# Altium PCB Var_7_PCB.PcbDoc
Units mm, origin at the board's own origin, x right, y up, seen from the top; angles counter-clockwise.
Board outline 70 x 20 mm, 3 copper layers (Top Layer, GND, Bottom Layer), stack 0.488 mm thick; 19 components, 28 nets, 100 pads, 73 vias.
Unrouted connection lines stored in the file: 40.
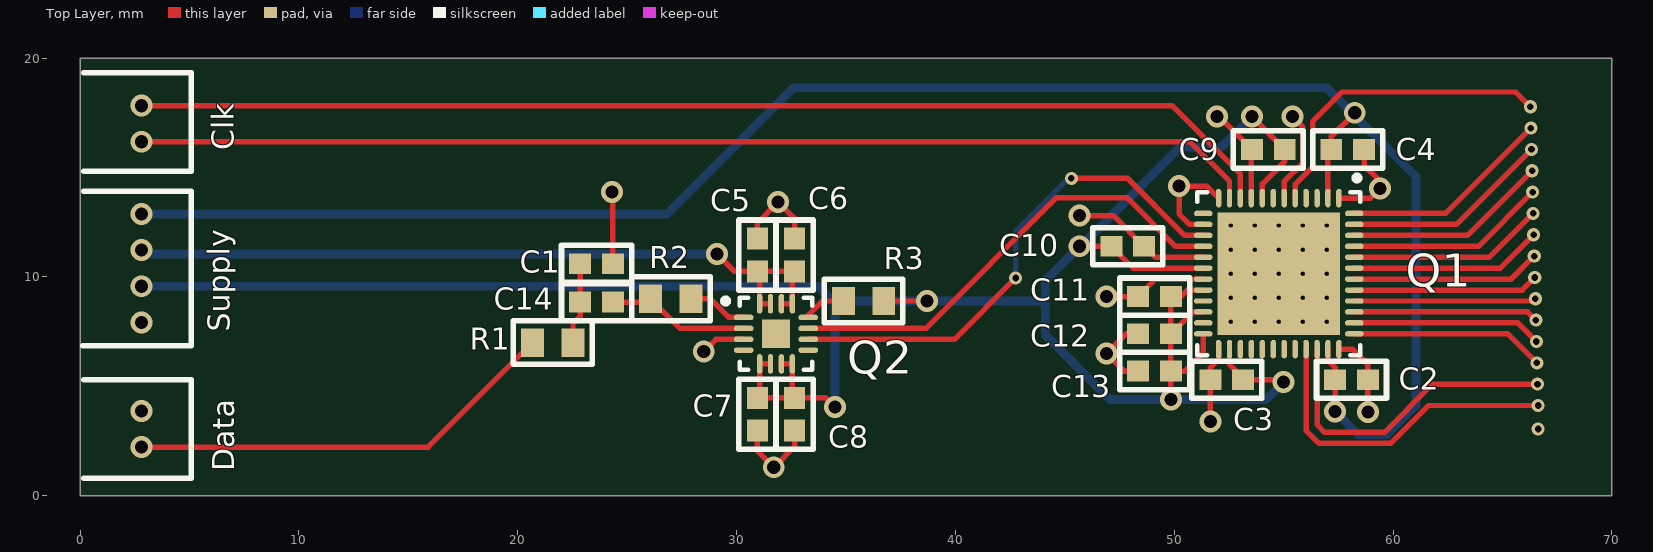
[diagram p0: Top Layer view]
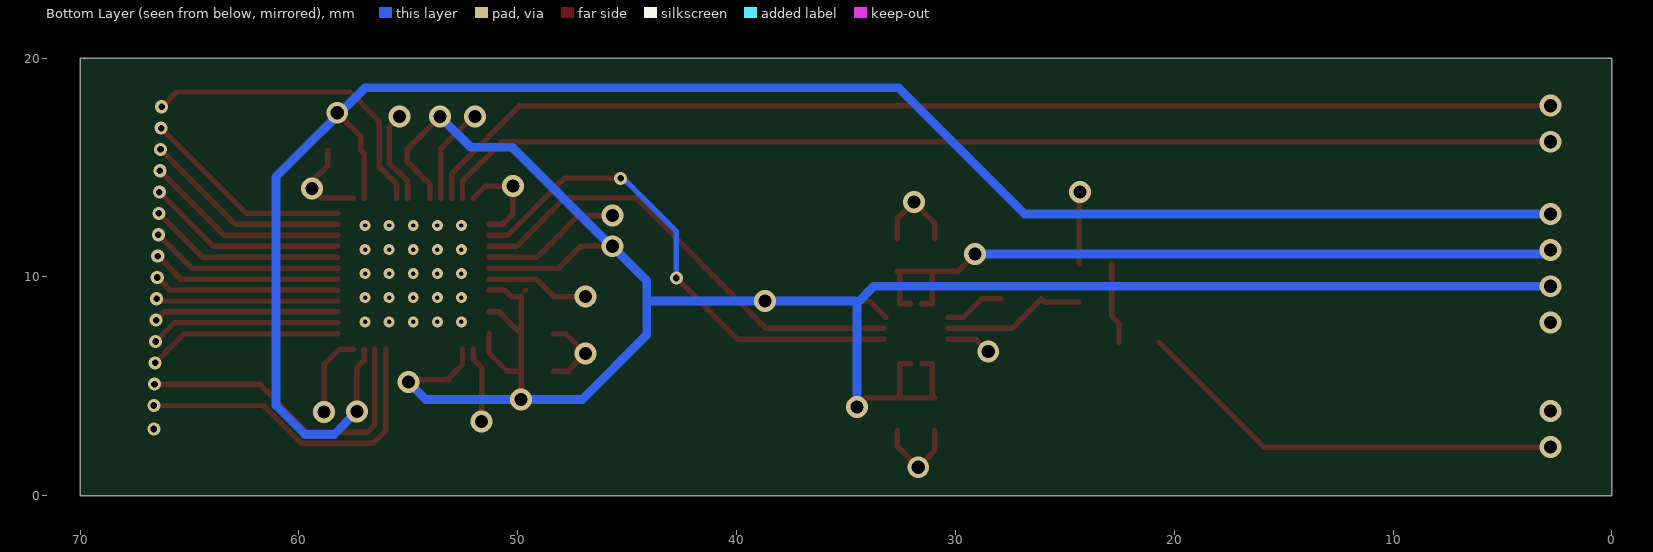
[diagram p1: Bottom Layer view, seen from below]
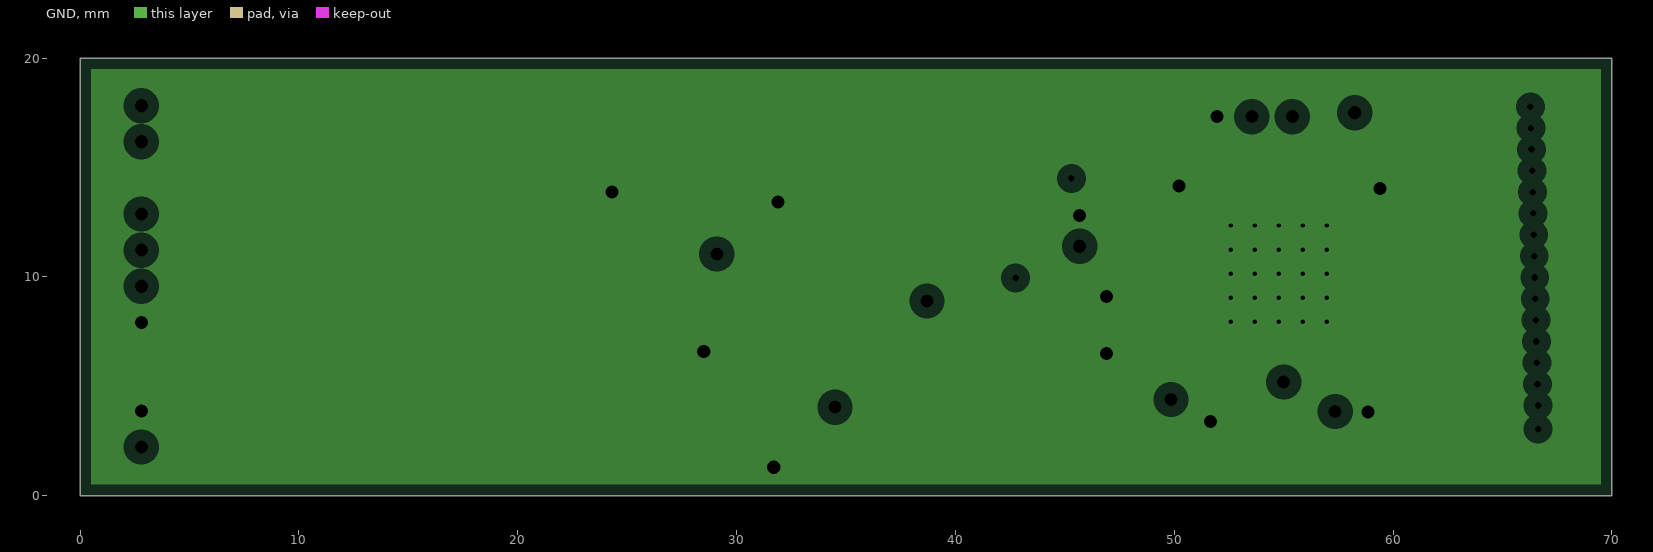
[diagram p2: GND, clearances drawn from the general rule]
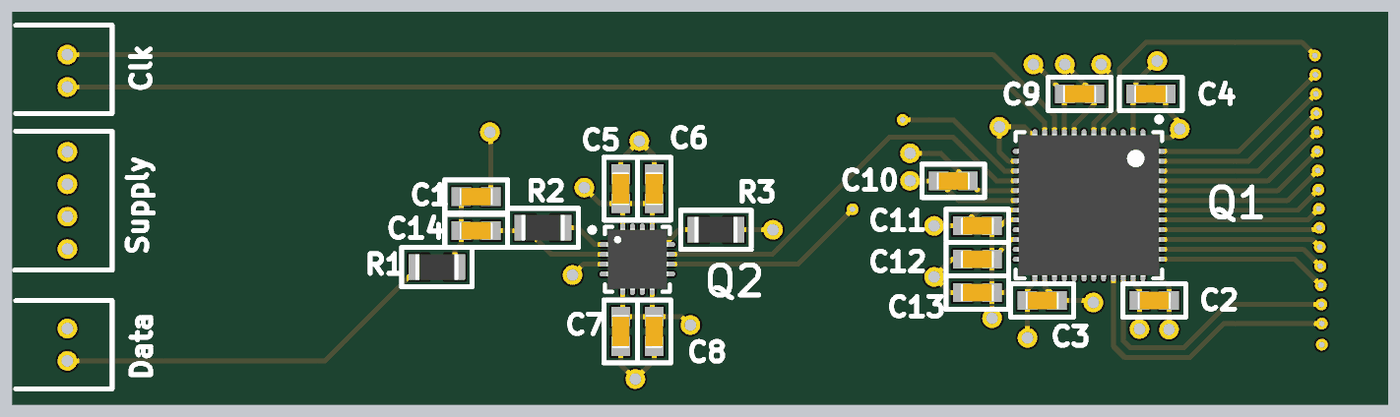
[diagram p3: 3D render of the assembled board from above, using the file's embedded part models]

## Layer stack, top to bottom
Top Solder: solder mask 0.0102, Solder Resist, Dk 3.5
Top Layer: signal copper 0.0356
Dielectric 1: core 0.254, FR-4, Dk 4.2
GND: plane copper 0.036, net GND
Dielectric 2: prepreg 0.127, Dk 4.2
Bottom Layer: signal copper 0.0356
Bottom Solder: solder mask 0.0102, Solder Resist, Dk 3.5

## Board outline
0,0 70,0 70,20 0,20

## Design rules (kind name [scope] priority, off if disabled: settings)
Clearance [All] p1: gap=0.2 ignorepadtopadclearanceinfootprint=FALSE
MinimumSolderMaskSliver [All] p1: minsoldermaskwidth=0.02
PlaneClearance [All] p1: clearance=0.508
PlaneConnect [All] p1: planeconnectstyle=Relief reliefexpansion=0.508 reliefentries=4 reliefconductorwidth=0.254 reliefairgap=0.254
PolygonConnect [All] p1: connectstyle=Relief reliefconductorwidth=0.254 reliefentries=4 polygonreliefangle="90 Angle" airgapwidth=0.254
RoutingVias [All] p1: holewidth=0.6 width=1 viastyle="Through Hole" minholewidth=0.3 minwidth=0.6 maxholewidth=0.8 maxwidth=2
SolderMaskExpansion [All] p1: expansion=0.102
Width [All] p1: maxlimit=0.5 minlimit=0.2 preferedwidth=0.4 toplayer_maxwidth=0.3 toplayer_prefwidth=0.25 minimp=50.000000 maximp=50.000000 favimp=50.000000
27 further rules are at their usual default settings.

## Components (designator, comment, footprint, x,y, rotation, side; value= is the part's Value field where it differs from the comment)
C1 "160uF" CAP0603 23.6,10.6 r0 top
C2 "0.1uF" CAP0603 58.1,5.3 r180 top
C3 "0.1uF" CAP0603 52.4,5.3 r0 top
C4 "0.1uF" CAP0603 57.925,15.825 r180 top
C5 "0.1uF" CAP0603 30.95,11 r90 top
C6 "0.1uF" CAP0603 32.65,11 r90 top
C7 "0.1uF" CAP0603 30.95,3.725 r270 top
C8 "0.1uF" CAP0603 32.65,3.725 r270 top
C9 "0.1uF" CAP0603 54.3,15.825 r180 top
C10 "0.1uF" CAP0603 47.875,11.4 r0 top
C11 "0.1uF" CAP0603 49.1,9.1 r180 top
C12 "0.1uF" CAP0603 49.1,7.4 r180 top
C13 "0.1uF" CAP0603 49.1,5.7 r180 top
C14 "100uF" CAP0603 23.6,8.85 r0 top
Q1 "ADS61B49" QFN49 54.775,10.15 r270 top
Q2 "ADA4932-1" QFN17 31.8,7.4 r0 top
R1 "10K" RES0805 21.6,7 r180 top
R2 "5K" RES0805 27,9 r180 top
R3 "10K" RES0805 35.8,8.9 r0 top

## Footprints (in the part's own frame and the unit in brackets; to place one, negate y for a bottom-side part, rotate by r counter-clockwise, add the part's x,y. Pads: shape width x height; smd on the part's side, far side on the other; paste and mask are expansions set on the pad)
CAP0603 [mm] "Chip Capacitor, 2-Leads, Body 1.60x0.80mm, IPC Medium Density"
  rect 1x0.95 smd: 1(-0.75,0) 2(0.75,0)
  silkscreen extent -1.6,-0.85 1.6,0.85, body extent -0.85,-0.45 0.85,0.45, height 0.8
QFN17 [mm] "QFN, 16-Leads, Body 3.00x3.00mm, Pitch 0.50mm, Thermal Pad 1.30x1.30mm, IPC Medium Density"
  oval 0.9x0.25 smd: 1(-1.475,0.75) 2(-1.475,0.25) 3(-1.475,-0.25) 4(-1.475,-0.75) 9(1.475,-0.75) 10(1.475,-0.25) 11(1.475,0.25) 12(1.475,0.75)
  oval 0.25x0.9 smd: 5(-0.75,-1.375) 6(-0.25,-1.375) 7(0.25,-1.375) 8(0.75,-1.375) 13(0.75,1.375) 14(0.25,1.375) 15(-0.25,1.375) 16(-0.75,1.375)
  rect 1.3x1.3 smd: 17(0,0)
  silkscreen extent -2.42,-1.65 1.65,1.65, body extent -1.55,-1.55 1.55,1.55, height 1
QFN49 [mm] "QFN, 48-Leads, Body 7.00x7.00mm, Pitch 0.50mm, Thermal Pad 5.61x5.61mm, IPC Medium Density"
  oval 0.85x0.25 smd: 1(-3.45,2.75) 2(-3.45,2.25) 3(-3.45,1.75) 4(-3.45,1.25) 5(-3.45,0.75) 6(-3.45,0.25) 7(-3.45,-0.25) 8(-3.45,-0.75) 9(-3.45,-1.25) 10(-3.45,-1.75) 11(-3.45,-2.25) 12(-3.45,-2.75) 25(3.45,-2.75) 26(3.45,-2.25) 27(3.45,-1.75) 28(3.45,-1.25) 29(3.45,-0.75) 30(3.45,-0.25) 31(3.45,0.25) 32(3.45,0.75) 33(3.45,1.25) 34(3.45,1.75) 35(3.45,2.25) 36(3.45,2.75)
  oval 0.25x0.85 smd: 13(-2.75,-3.45) 14(-2.25,-3.45) 15(-1.75,-3.45) 16(-1.25,-3.45) 17(-0.75,-3.45) 18(-0.25,-3.45) 19(0.25,-3.45) 20(0.75,-3.45) 21(1.25,-3.45) 22(1.75,-3.45) 23(2.25,-3.45) 24(2.75,-3.45) 37(2.75,3.45) 38(2.25,3.45) 39(1.75,3.45) 40(1.25,3.45) 41(0.75,3.45) 42(0.25,3.45) 43(-0.25,3.45) 44(-0.75,3.45) 45(-1.25,3.45) 46(-1.75,3.45) 47(-2.25,3.45) 48(-2.75,3.45)
  rect 5.61x5.61 smd: 49(0,0)
  silkscreen extent -4.5,-3.72 3.72,3.73, body extent -3.62,-3.62 3.62,3.62, height 1
RES0805 [mm] "Chip Resistor, 2-Leads, Body 2.10x1.25mm, IPC Medium Density"
  rect 1.05x1.3 smd: 1(-0.925,0) 2(0.925,0)
  silkscreen extent -1.8,-1 1.8,1, body extent -1.1,-0.65 1.1,0.65, height 0.55

## Part data
C1 C2 C3 C4 C5 C6 C7 C8 C9 C10 C11 C12 C13 C14: library part Capacitor
R1 R2 R3: library part Resistor

## Via types
v1: diameter 1, hole 0.6, Top Layer to Bottom Layer, 30 vias
v2: diameter 0.5, hole 0.2, Top Layer to Bottom Layer, 25 vias
v3: diameter 0.6, hole 0.3, Top Layer to Bottom Layer, 18 vias

## Nets (pads, with @x,y where several pads share a name; then routed paths per layer and width w, separated by ;. In a path a pad name is that pad's centre, name@x,y a point inside that pad or via, vN(x,y) a via of type N, cw(c..) or ccw(c..) an arc to the next point about the centre after c; other vN are vias at no path point)
+1.8V: C2.2 C4.2 Q1.2 Q1.35 | length 84.9
  Top Layer w0.25: Q1.35 57.025,6.175 57.35,5.85 C2.2 v1(57.35,3.85) ; Q1.2 57.025,15.65 57.175,15.8 C4.2 57.175,16.425 v1(58.25,17.5)
  Bottom Layer w0.4: v1(2.8,12.875) 26.825,12.875 32.6,18.65 56.975,18.65 61.05,14.575 61.05,4.125 59.725,2.8 58.4,2.8 v1(57.35,3.85)
+3.3V: C3.2 C7.1 C8.1 C9.1 C10.1 C11.1 C12.1 C13.1 Q1.8 Q1.18 Q1.20 Q1.22 Q1.24 Q1.26 Q2.5 Q2.6 Q2.7 Q2.8 R3.2 | length 108.7
  Top Layer w0.25: Q2.6 Q2.5 31.05,4.575 C7.1 C8.1 ; Q2.7 Q2.8 32.55,4.575 C8.1 ; v1(34.5,4.05) 34.075,4.475 C8.1 ; R3.2 v1(38.7,8.9) ; v1(45.675,11.4) C10.1 48.125,10.4 Q1.18 ; v1@49.85,4.7 C13.1 ; Q1.24 51.325,6.525 50.5,5.7 C13.1 ; Q1.22 50.85,8.4 C12.1 ; Q1.20 50.6,9.4 50.3,9.1 C11.1 C12.1 ; Q1.26 52.525,6 53.15,5.375 C3.2 54.9,5.3 v1(55,5.2) ; v1(53.55,17.325) C9.1 55.05,15.275 54.025,14.25 Q1.8 ; C13.1 C12.1
  Bottom Layer w0.4: v1(2.8,9.575) 33.725,9.575 34.5,8.8 ; v1(34.5,4.05) 34.5,8.8 ; v1(45.675,11.4) 44.1,9.825 44.1,8.9 ; v1@45.7,11.375 50.25,15.925 52.15,15.925 v1(53.55,17.325) ; v1(55,5.2) 54.2,4.4 v1(49.85,4.4) 47.05,4.4 44.1,7.35 44.1,8.9 ; 34.5,8.8 34.6,8.9 v1(38.7,8.9) 44.1,8.9
-3.3V: C5.1 C6.1 Q2.13 Q2.14 Q2.15 Q2.16 | length 34.3
  Top Layer w0.25: v1(29.1,11.05) 29.9,10.25 C5.1 ; Q2.15 Q2.16 31.05,10.15 C5.1 ; Q2.14 Q2.13 32.55,10.15 C6.1 C5.1
  Bottom Layer w0.4: v1(2.8,11.225) 2.975,11.05 v1(29.1,11.05)
CLKM: Q1.11 | length 51.2
  Top Layer w0.25: v1(2.8,16.175) 50.725,16.175 52.525,14.375 Q1.11
CLKOUT: Q1.5 | length 14.6
  Top Layer w0.25: Q1.5 55.525,14.229 56.325,15.029 56.325,17.1 57.675,18.45 65.6,18.45 v3(66.275,17.775)
CLKP: Q1.10 | length 52.6
  Top Layer w0.25: v1(2.8,17.825) 49.9,17.825 53.025,14.7 Q1.10
D0: Q1.33 | length 15.3
  Top Layer w0.25: Q1.33 56.025,2.975 56.6,2.4 59.9,2.4 61.625,4.125 v3(66.625,4.125)
D1: Q1.34 | length 14.6
  Top Layer w0.25: Q1.34 56.525,3.25 56.875,2.9 59.6,2.9 61.8,5.1 v3(66.6,5.1)
D2: Q1.37 | length 8.9
  Top Layer w0.25: Q1.37 65.25,7.4 v3(66.575,6.075)
D3: Q1.38 | length 8.7
  Top Layer w0.25: Q1.38 65.7,7.9 v3(66.55,7.05)
D4: Q1.39 | length 8.5
  Top Layer w0.25: Q1.39 66.15,8.4 v3(66.525,8.025)
D5: Q1.40 | length 8.3
  Top Layer w0.25: Q1.40 v3@66.5,8.9
  other v3: 66.5,9
D6: Q1.41 | length 8.5
  Top Layer w0.25: Q1.41 65.9,9.4 v3(66.475,9.975)
D7: Q1.42 | length 8.7
  Top Layer w0.25: Q1.42 65.4,9.9 v3(66.45,10.95)
D8: Q1.43 | length 8.8
  Top Layer w0.25: Q1.43 64.9,10.4 v3(66.425,11.925)
D9: Q1.44 | length 9
  Top Layer w0.25: Q1.44 64.4,10.9 v3(66.4,12.9)
D10: Q1.45 | length 9.2
  Top Layer w0.25: Q1.45 63.9,11.4 v3(66.375,13.875)
D11: Q1.46 | length 9.3
  Top Layer w0.25: Q1.46 63.4,11.9 v3(66.35,14.85)
D12: Q1.47 | length 9.5
  Top Layer w0.25: Q1.47 62.9,12.4 v3(66.325,15.825)
D13: Q1.48 | length 9.7
  Top Layer w0.25: Q1.48 62.4,12.9 v3(66.3,16.8)
GND: C1.2 C2.1 C3.1 C4.1 C5.2 C6.2 C7.2 C8.2 C9.2 C10.2 C11.2 C12.2 C13.2 Q1.1 Q1.9 Q1.12 Q1.14 Q1.17 Q1.19 Q1.25 Q1.36 Q1.49 Q2.3 | length 48.7
  Top Layer w0.25: v1(24.3,13.875) 24.35,13.825 C1.2 ; v1(28.5,6.6) 29.05,7.15 Q2.3 ; C7.2 30.95,2.05 v1(31.7,1.3) 32.65,2.25 C8.2 ; C5.2 30.95,12.475 v1(31.9,13.425) 32.65,12.675 C6.2 ; v1@45.475,12.8 47.225,12.8 C10.2 49.125,10.9 Q1.17 ; v1(46.9,9.1) C11.2 49.15,9.9 Q1.19 ; C13.2 47.7,5.7 v1(46.9,6.5) 47.8,7.4 C12.2 ; Q1.14 50.7,12.4 50.225,12.875 v1(50.225,14.15) 51.475,14.15 Q1.12 ; v1(51.65,3.4) C3.1 51.65,5.85 52.025,6.225 Q1.25 ; v1(51.95,17.325) 52.05,17.325 C9.2 ; Q1.9 53.525,15.6 C9.2@53.55,15.625 ; Q1.36 58.15,6.7 58.85,6 C2.1 v1(58.85,3.825) ; Q1.1 58.964,13.6 v1(59.4,14.036) 59.4,14.375 58.675,15.1 C4.1@58.675,15.8
  other v1: 2.8,3.875 2.8,7.925 45.675,12.8
  other v2: 52.575,7.95 53.675,7.95 54.775,7.95 55.875,7.95 56.975,7.95 52.575,9.05 53.675,9.05 54.775,9.05 55.875,9.05 56.975,9.05 52.575,10.15 53.675,10.15 54.775,10.15 55.875,10.15 56.975,10.15 52.575,11.25 53.675,11.25 54.775,11.25 55.875,11.25 56.975,11.25 52.575,12.35 53.675,12.35 54.775,12.35 55.875,12.35 56.975,12.35
"Input Signal": R1.2 | length 19.9
  Top Layer w0.25: v1(2.8,2.225) 15.9,2.225 R1.2
NetC1_1: C1.1 C14.1 R1.1 | length 3.7
  Top Layer w0.25: R1.1 22.525,7.875 22.85,8.2 C14.1 C1.1
NetC14_2: C14.2 Q2.2 R2.2 | length 6.6
  Top Layer w0.25: C14.2 25.925,8.85 R2.2 27.425,7.65 Q2.2
NetQ1_15: Q1.15 Q2.10 | length 23.4
  Top Layer w0.25: Q2.10 39.95,7.15 v3(42.75,9.95) ; v3(45.3,14.5) 47.875,14.5 50.475,11.9 Q1.15
  Bottom Layer w0.25: v3(42.75,9.95) 42.75,12.075 45.175,14.5 v3(45.3,14.5)
NetQ1_16: Q1.16 Q2.11 | length 21.4
  Top Layer w0.25: Q2.11 38.65,7.65 44.625,13.625 47.835,13.625 50.06,11.4 Q1.16
NetQ2_1: Q2.1 R2.1 | length 2.8
  Top Layer w0.25: R2.1 28.8,9 29.65,8.15 Q2.1
NetQ2_12: Q2.12 R3.1 | length 2
  Top Layer w0.25: Q2.12@33.175,8.15 33.925,8.9 R3.1
pads on no net: Q1.3 Q1.4 Q1.6 Q1.7 Q1.13 Q1.21 Q1.23 Q1.27 Q1.28 Q1.29 Q1.30 Q1.31 Q1.32 Q2.4 Q2.9 Q2.17
copper on no net: | length 4.3
  Top Layer w0.25: 55.025,13.6 55.025,14.365 55.875,15.215 55.875,16.85 v1(55.4,17.325)
  other v3: 66.625,3.05

## Polygon pours and split planes (outlines as drawn)
GND on GND (split plane): 69.49,19.49 69.49,0.51 0.51,0.51 0.51,19.49

## Silkscreen, mask and mechanical layers (free items; w line width, h text height)
Top Overlay:
  lines w0.25: 0.125,6.85 5.025,6.85 ; 0.175,0.8 5.075,0.8 5.075,5.3 0.175,5.3 ; 0.175,13.925 5.075,13.925 5.075,6.85 ; 0.175,14.825 5.075,14.825 5.075,19.325 0.175,19.325
  text "Clk" at 7.025,15.8 h1 r90
  text "Supply" at 6.85,7.5 h1 r90
  text "Data" at 7.05,1.125 h1 r90